# EAGLE board Front (EAGLE 6.3)
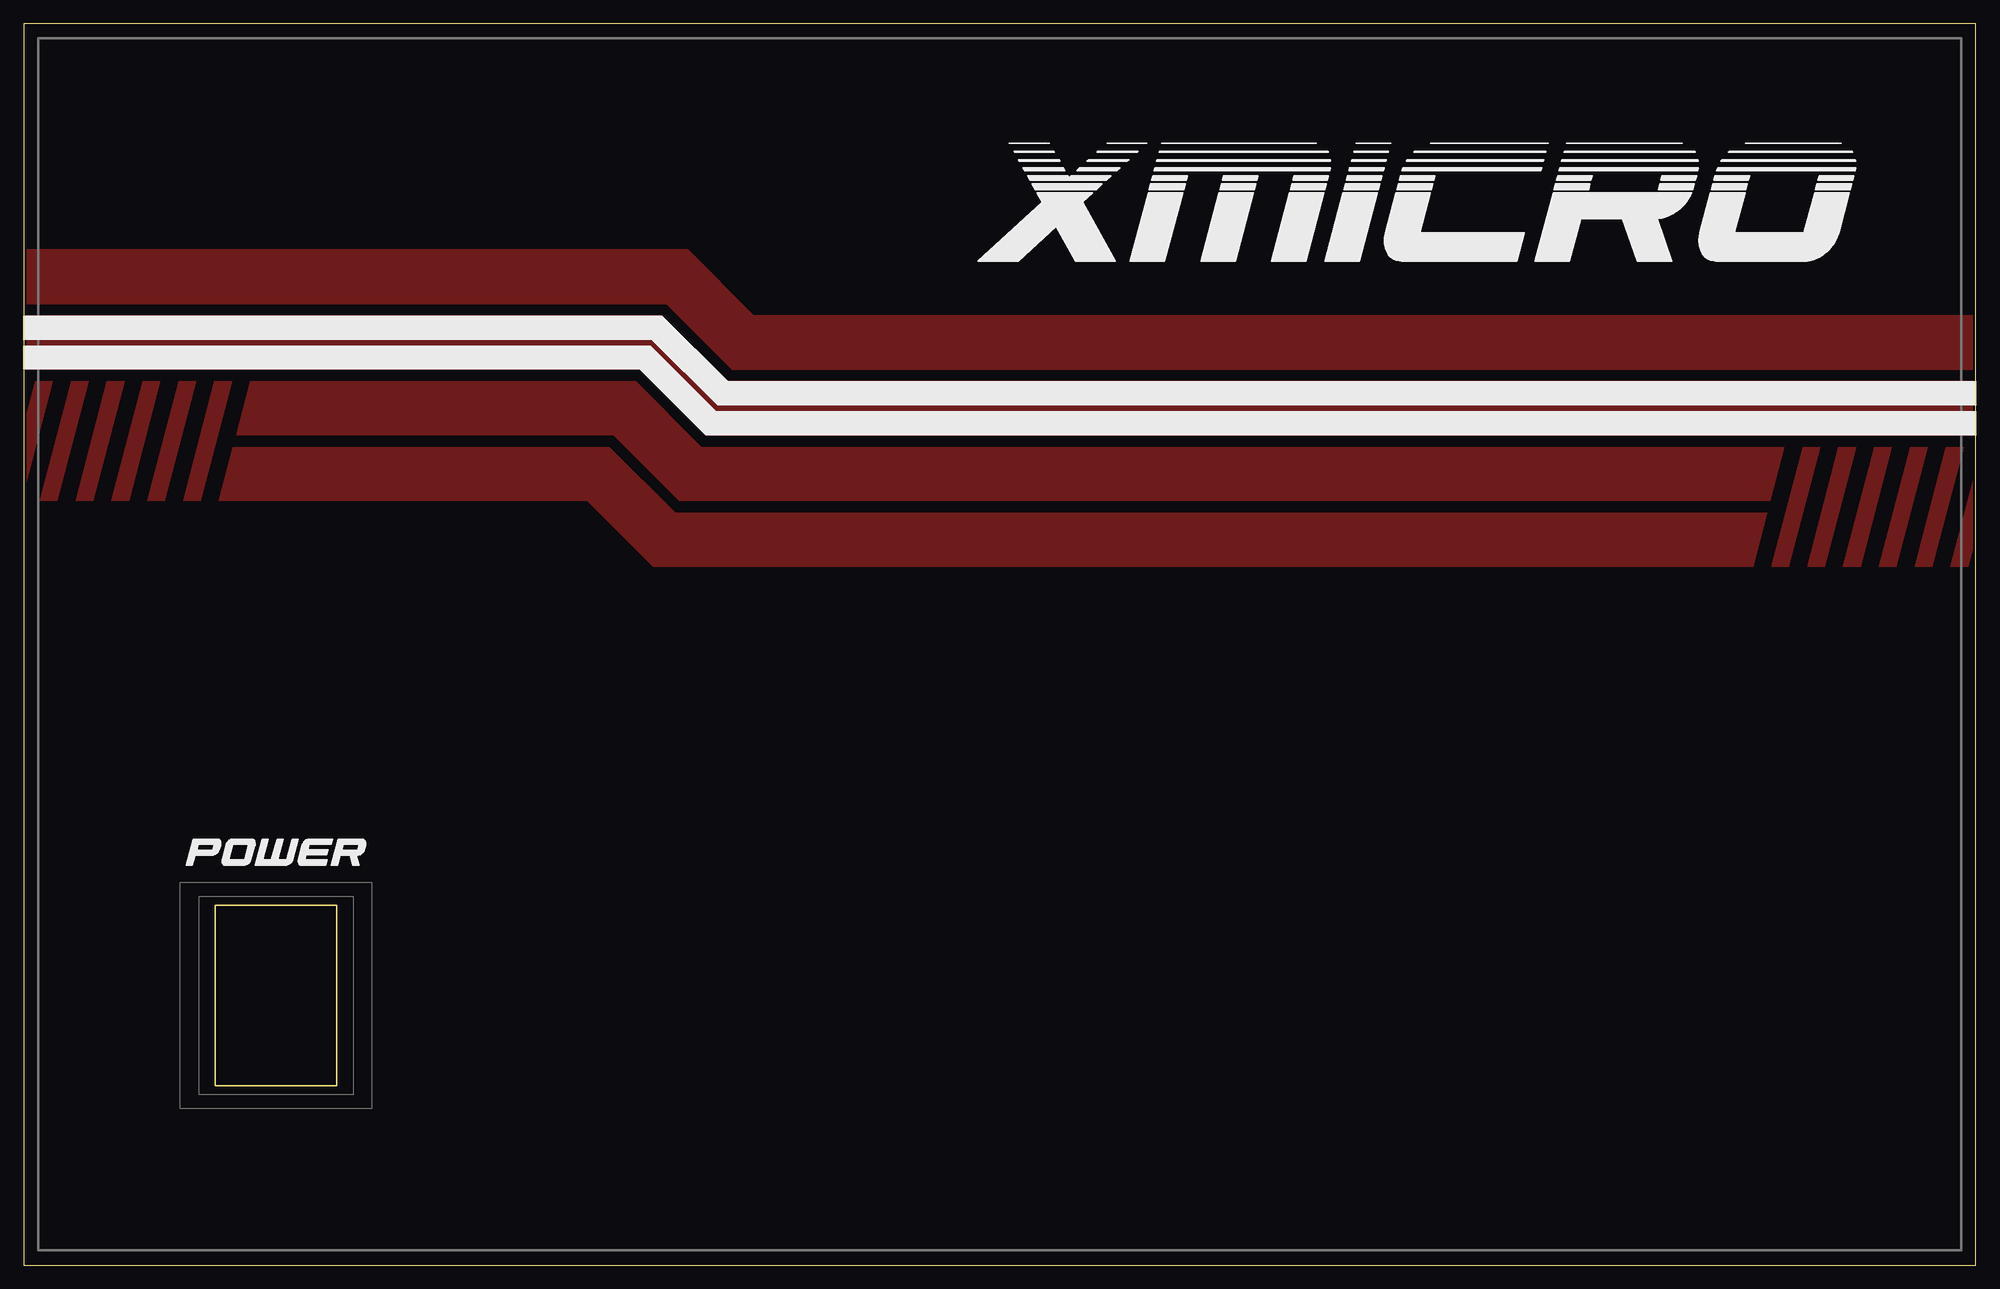
[diagram p0: board, top side]
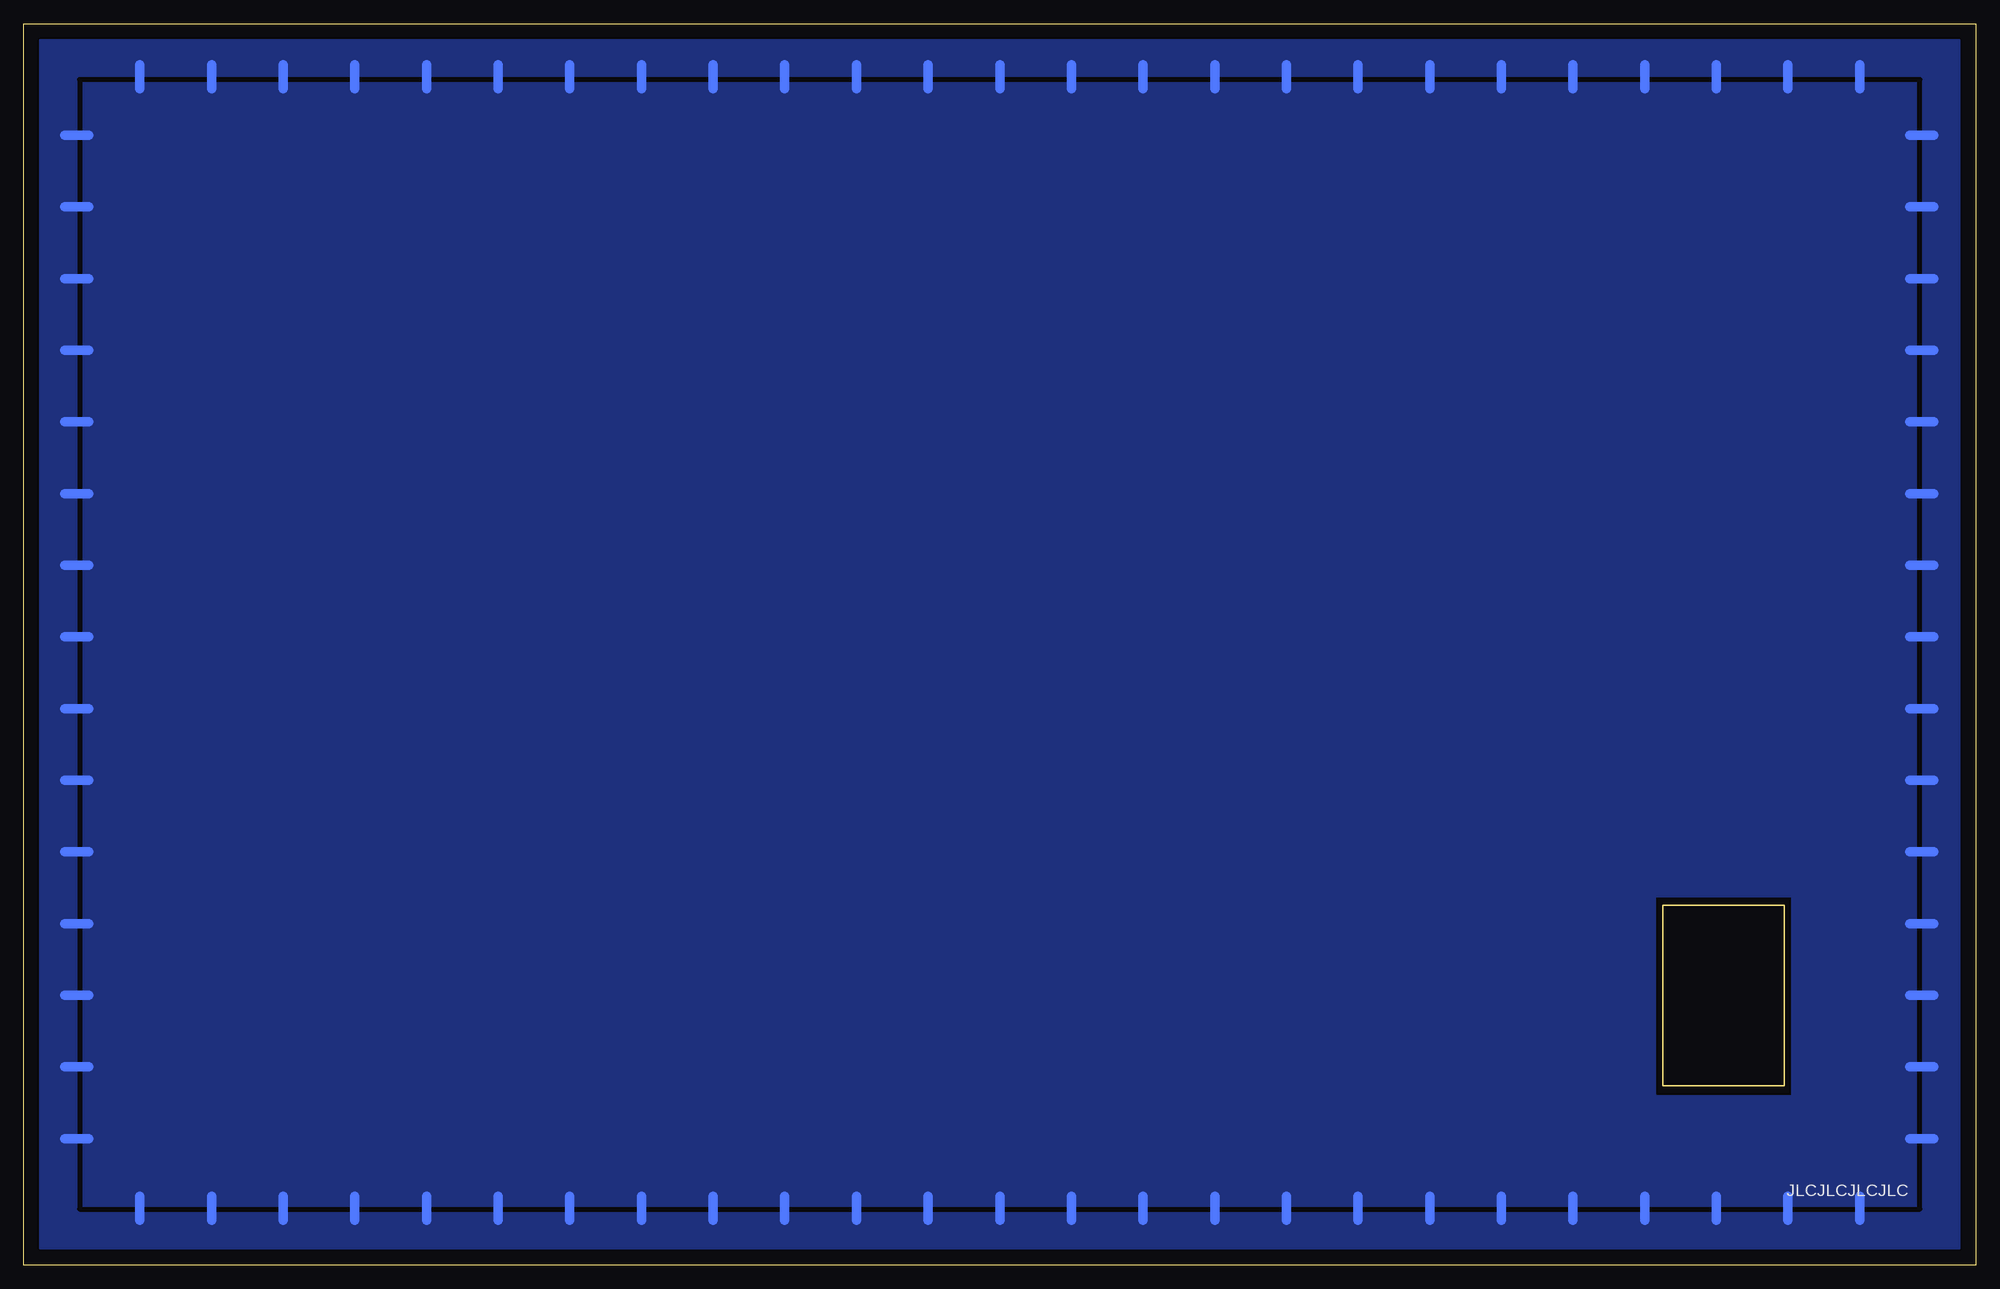
[diagram p1: board, bottom side, seen from below]

Size 207.65 x 132.02 mm. Coordinates in mm from the lower left corner, seen from the top.
Outline: 0,0 207.65,0 207.65,132.02 0,132.02 0,0
Copper layers (1*16): Top 0.035mm / dielectric 1.5mm / Bottom 0.035mm
Design rules "JLCPCB Custom": minimum track width 5mil, minimum drill 0.3mm, track to track 5mil, track to pad 8mil, pad to pad 8mil, via to via 8mil, smd to smd 5mil, copper to edge 0.3mm, drill to drill 0.3mm, minimum pad ring 10mil, minimum via ring 8mil, stop-mask expansion 0mil, vias tented up to drill 25mil, thermal gap 10mil
tRestrict: area 207.6,78.1 to 210.5,87.3; area -2.5,80.6 to 0,88.3
bRestrict: area 19.7,18.1 to 34,39.1; 4 lines

## Placement (x,y rotation side)
E$1  [JWS11BAAD-A]  26.86,28.66 0 top

## Library data of the parts
E$1 = panel

## Tracks (layer width: path | path; a pad name or v marks a point on that pad's centre or on a via)
S$1
  pour Top: 207.65,100.95 77.66,100.95 70.68,107.94 0,107.94 0,102.22 68.39,102.22 75.37,95.24 207.65,95.24
  pour Top: 207.65,93.97 74.87,93.97 67.88,100.95 0,100.95 0,95.24 65.6,95.24 72.58,88.25 207.65,88.25
S$2
  pour Top: 1.3,93.97 3.08,93.97 -0.26,81.27 -2.04,81.27
S$36
  pour Top: 5.11,93.97 6.89,93.97 3.55,81.27 1.77,81.27
S$37
  pour Top: 8.92,93.97 10.7,93.97 7.36,81.27 5.58,81.27
S$38
  pour Top: 12.73,93.97 14.51,93.97 11.17,81.27 9.39,81.27
S$39
  pour Top: 16.54,93.97 18.32,93.97 14.98,81.27 13.2,81.27
S$40
  pour Top: 20.35,93.97 22.13,93.97 18.79,81.27 17.01,81.27
S$41
  pour Top: 208.31,86.98 210.09,86.98 206.75,74.28 204.97,74.28
S$42
  pour Top: 204.5,86.98 206.28,86.98 202.94,74.28 201.16,74.28
S$43
  pour Top: 200.69,86.98 202.47,86.98 199.13,74.28 197.35,74.28
S$44
  pour Top: 196.88,86.98 198.66,86.98 195.32,74.28 193.54,74.28
S$53
  pour Top: 193.07,86.98 194.85,86.98 191.51,74.28 189.73,74.28
S$54
  pour Top: 189.26,86.98 191.04,86.98 187.7,74.28 185.92,74.28
S$55
  pour Top: 22.32,86.98 62.29,86.98 69.28,80 185.39,80 183.89,74.28 66.99,74.28 60.01,81.27 20.82,81.27
  pour Top: 24.16,93.97 65.09,93.97 72.07,86.98 187.23,86.98 185.73,81.27 69.79,81.27 62.8,88.25 22.66,88.25
S$79
  Bottom 1.016: 172.4,7.3 172.4,4.76 | 180.02,7.3 180.02,4.76 | 187.64,7.3 187.64,4.76 | 149.54,7.3 149.54,4.76 | 157.16,7.3 157.16,4.76 | 164.78,7.3 164.78,4.76 | 126.68,7.3 126.68,4.76 | 134.3,7.3 134.3,4.76 | 141.92,7.3 141.92,4.76 | 195.26,7.3 195.26,4.76 | 103.82,7.3 103.82,4.76 | 111.44,7.3 111.44,4.76 | 119.06,7.3 119.06,4.76 | 80.96,7.3 80.96,4.76 | 88.58,7.3 88.58,4.76 | 96.2,7.3 96.2,4.76 | 58.1,7.3 58.1,4.76 | 65.72,7.3 65.72,4.76 | 73.34,7.3 73.34,4.76 | 35.24,7.3 35.24,4.76 | 42.86,7.3 42.86,4.76 | 50.48,7.3 50.48,4.76 | 12.38,7.3 12.38,4.76 | 20,7.3 20,4.76 | 27.62,7.3 27.62,4.76 | 12.38,127.62 12.38,125.08 | 20,127.62 20,125.08 | 27.62,127.62 27.62,125.08 | 35.24,127.62 35.24,125.08 | 42.86,127.62 42.86,125.08 | 50.48,127.62 50.48,125.08 | 58.1,127.62 58.1,125.08 | 65.72,127.62 65.72,125.08 | 73.34,127.62 73.34,125.08 | 80.96,127.62 80.96,125.08 | 88.58,127.62 88.58,125.08 | 96.2,127.62 96.2,125.08 | 103.82,127.62 103.82,125.08 | 111.44,127.62 111.44,125.08 | 119.06,127.62 119.06,125.08 | 126.68,127.62 126.68,125.08 | 134.3,127.62 134.3,125.08 | 141.92,127.62 141.92,125.08 | 149.54,127.62 149.54,125.08 | 157.16,127.62 157.16,125.08 | 164.78,127.62 164.78,125.08 | 172.4,127.62 172.4,125.08 | 180.02,127.62 180.02,125.08 | 187.64,127.62 187.64,125.08 | 195.26,127.62 195.26,125.08 | 200.71,112.52 203.25,112.52 | 200.71,120.14 203.25,120.14 | 200.71,89.66 203.25,89.66 | 200.71,97.28 203.25,97.28 | 200.71,104.9 203.25,104.9 | 200.71,66.8 203.25,66.8 | 200.71,74.42 203.25,74.42 | 200.71,82.04 203.25,82.04 | 200.71,43.94 203.25,43.94 | 200.71,51.56 203.25,51.56 | 200.71,59.18 203.25,59.18 | 200.71,21.08 203.25,21.08 | 200.71,28.7 203.25,28.7 | 200.71,36.32 203.25,36.32 | 200.71,13.46 203.25,13.46
  Bottom 1.016: 4.5,112.52 7.04,112.52 | 4.5,120.14 7.04,120.14 | 4.5,89.66 7.04,89.66 | 4.5,97.28 7.04,97.28 | 4.5,104.9 7.04,104.9 | 4.5,66.8 7.04,66.8 | 4.5,74.42 7.04,74.42 | 4.5,82.04 7.04,82.04 | 4.5,43.94 7.04,43.94 | 4.5,51.56 7.04,51.56 | 4.5,59.18 7.04,59.18 | 4.5,21.08 7.04,21.08 | 4.5,28.7 7.04,28.7 | 4.5,36.32 7.04,36.32 | 4.5,13.46 7.04,13.46
  pour Bottom: 1.78,130.24 205.87,130.24 205.87,1.78 1.78,1.78

## Text on the board
bPlace: JLCJLCJLCJLC